# Altium PCB MotorSurucuv2.PcbDoc
Units mm, origin at the board's own origin, x right, y up, seen from the top; angles counter-clockwise.
Board outline 44.6 x 69.1 mm, 2 copper layers (Top Layer, Bottom Layer); 36 components, 21 nets, 93 pads, 42 vias.
Unrouted connection lines stored in the file: 18.
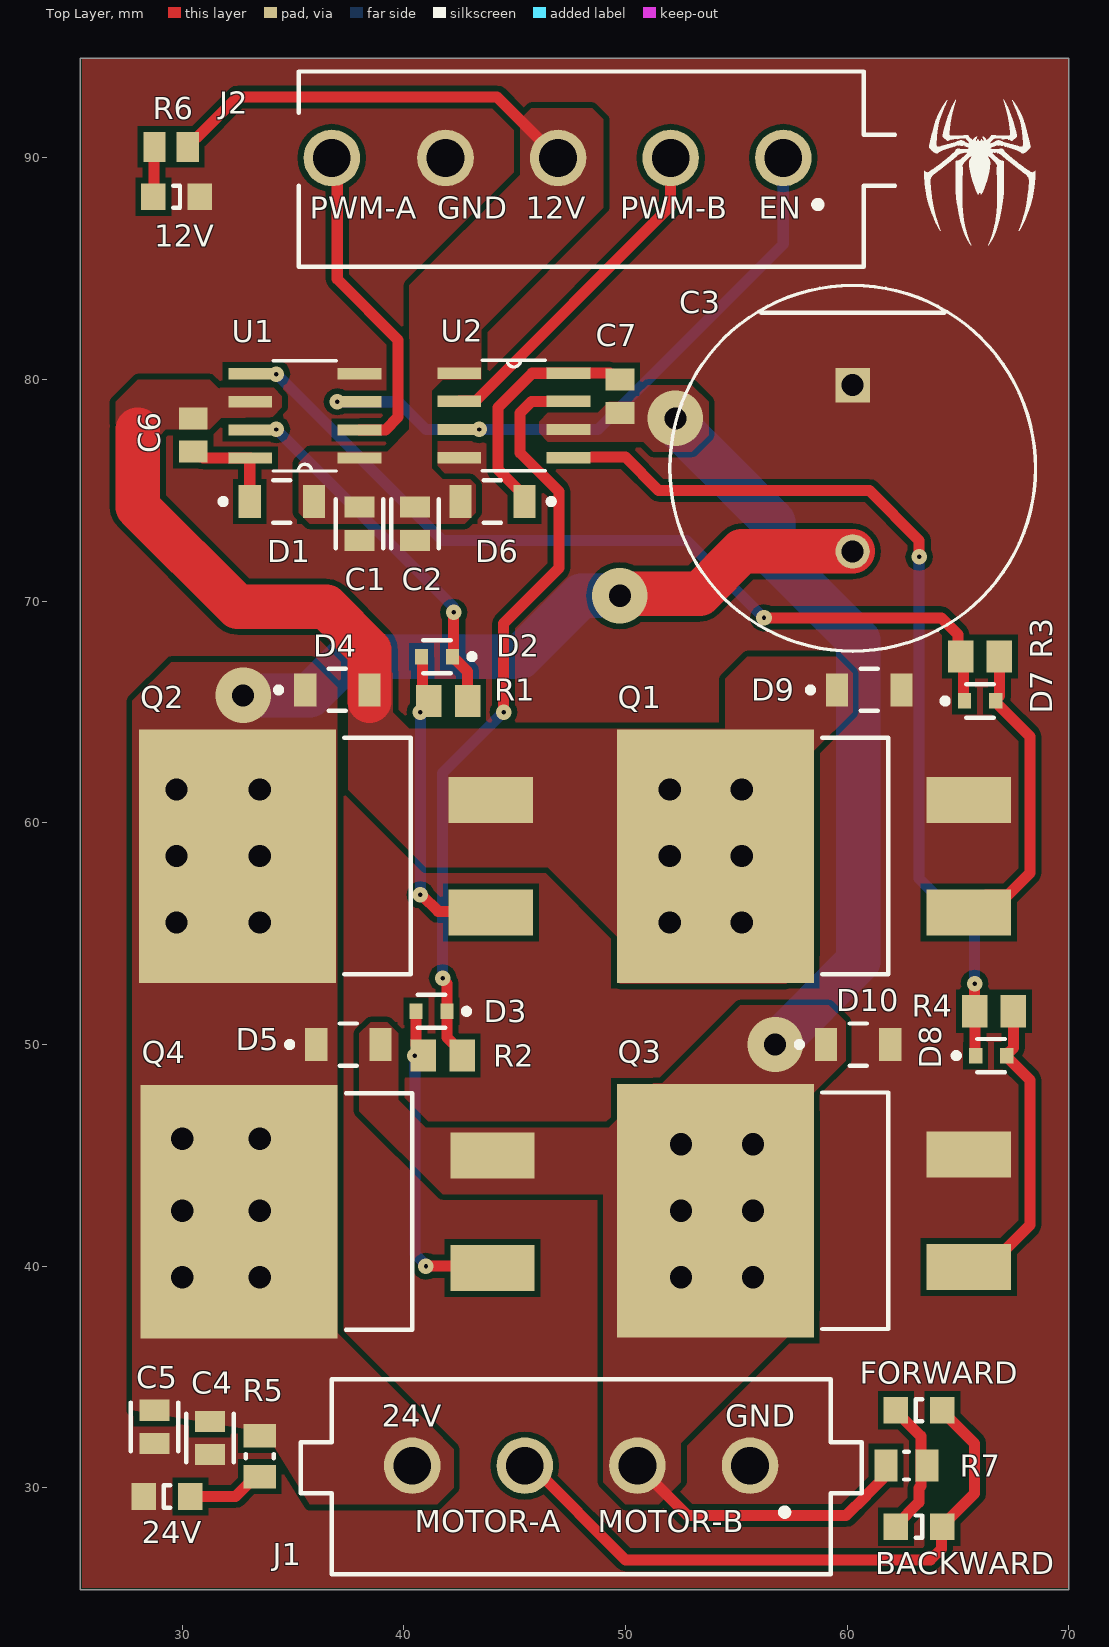
[diagram p0: Top Layer view]
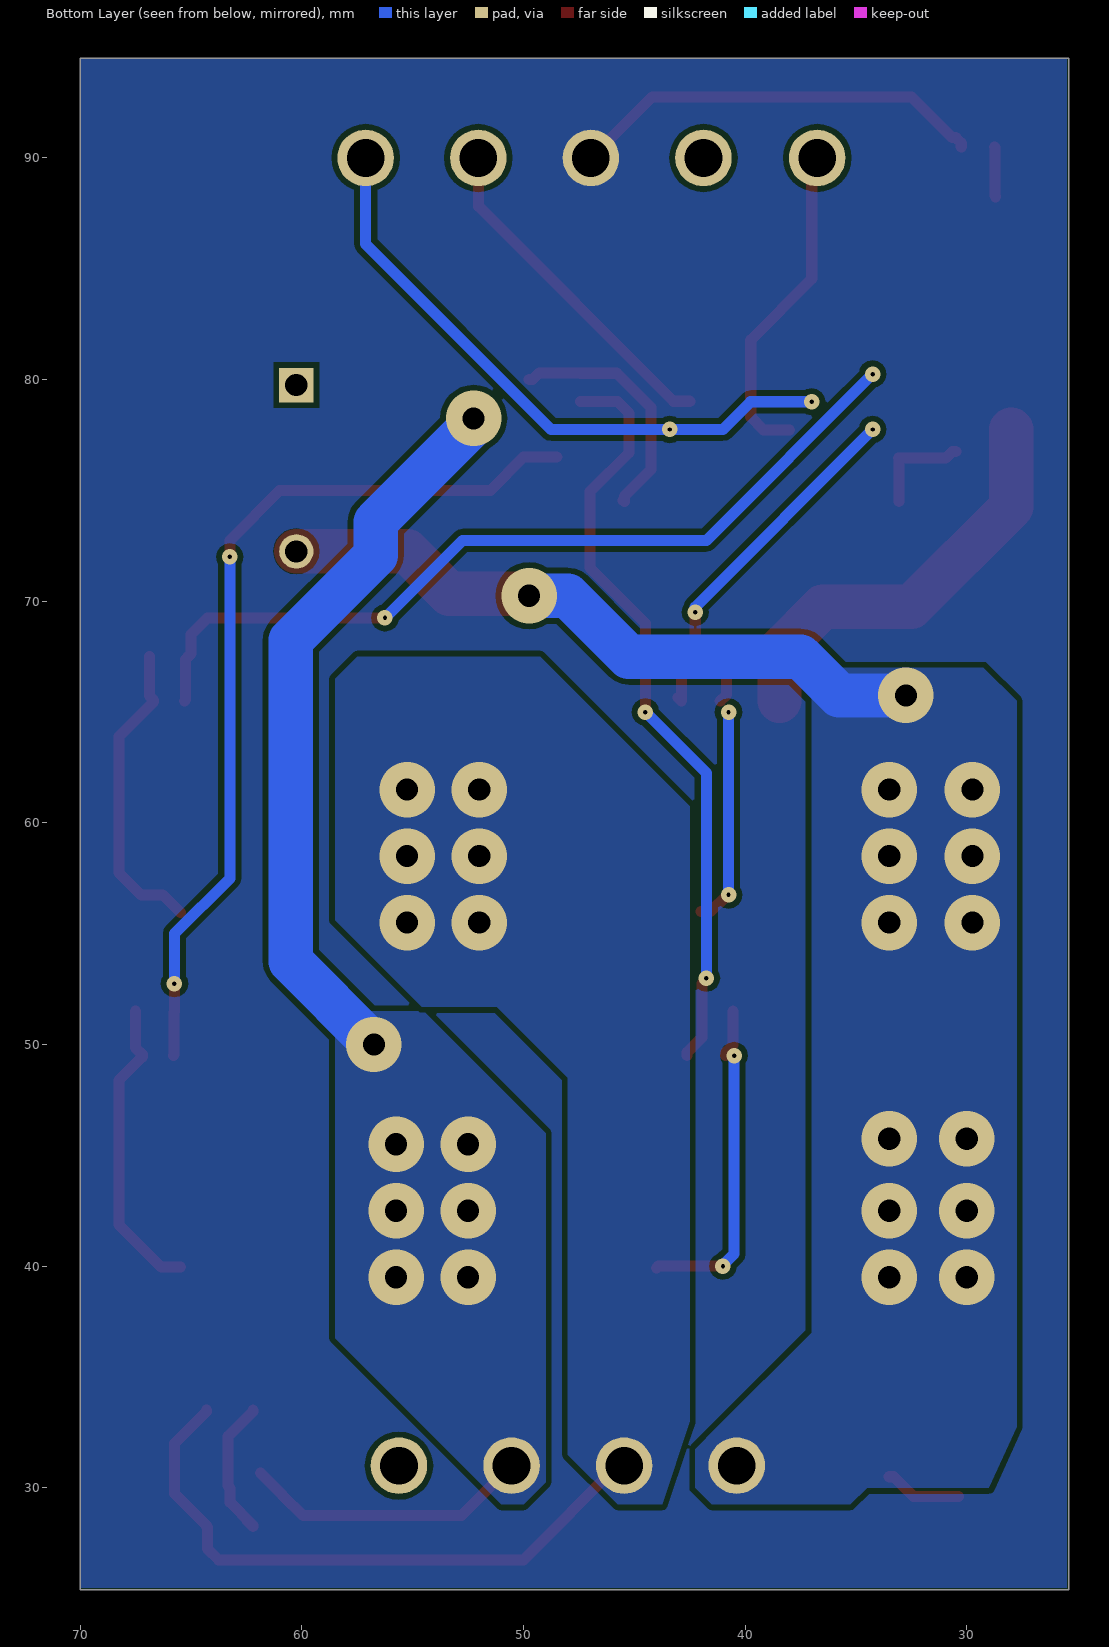
[diagram p1: Bottom Layer view, seen from below]
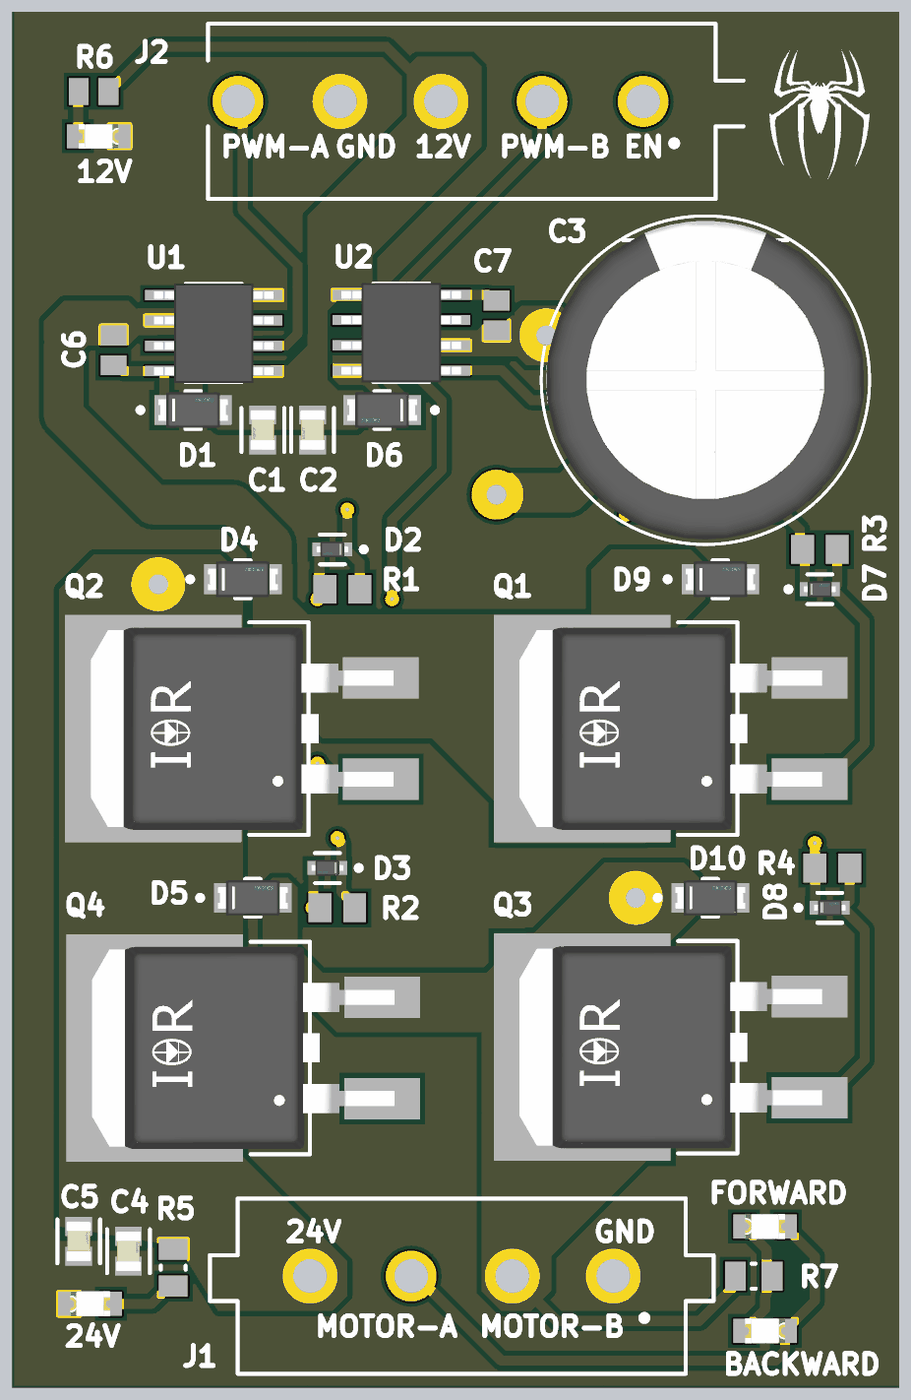
[diagram p2: 3D render of the assembled board from above, using the file's embedded part models]

## Layer stack, top to bottom
Top Solder: solder mask 0.0102, Solder Resist, Dk 3.5
Top Layer: signal copper 0.0356
Dielectric 1: dielectric 0.32, FR-4, Dk 4.8
Bottom Layer: signal copper 0.0356
Bottom Solder: solder mask 0.0102, Solder Resist, Dk 3.5

## Board outline
25.4,25.4 70,25.4 70,94.5 25.4,94.5

## Design rules (kind name [scope] priority, off if disabled: settings)
Clearance [All] p1: gap=0.254 ignorepadtopadclearanceinfootprint=FALSE except(0: Arc-Hole Track-Hole SMDPad-Hole THPad-Hole Via-Hole Fill-Hole Poly-Hole Region-Hole Text-Hole)
HoleSize [All] p1: absolutevalues=TRUE maxlimit=6.54 minlimit=0.2 maxpercent=80.000 minpercent=20.000
MinimumSolderMaskSliver [All] p1: minsoldermaskwidth=0.15
PolygonConnect [All] p1: connectstyle=Relief reliefconductorwidth=0.254 reliefentries=4 polygonreliefangle="90 Angle" airgapwidth=0.254
RoutingVias [All] p1: holewidth=0.711 width=1.27 viastyle="Through Hole" minholewidth=0.711 minwidth=1.27 maxholewidth=0.711 maxwidth=1.27
SilkToSolderMaskClearance [IsPad] p1: minsilkscreentomaskgap=0.1 clearancetoexposedcopper=TRUE
SolderMaskExpansion [All] p1: expansion=0.102 istentingtop=FALSE
Width [All] p1: maxlimit=6 minlimit=0.254 preferedwidth=0.254
27 further rules are at their usual default settings.

## Components (designator, comment, footprint, x,y, rotation, side; value= is the part's Value field where it differs from the comment)
12V "150080RS75000" 0805_A 29.75,88.25 r180 top (schematic designator LED2)
24V "150080RS75000" 0805_A 29.321,29.609 r0 top (schematic designator LED1)
BACKWARD "150080BS75000" 0805_A 63.25,28.25 r180 top (schematic designator LED4)
C1 "C0805C104K5RACTU" FP-C0805C-DN-MFG 38,73.5 r90 top value="0.10 μF"
C2 "C0805C104K5RACTU" FP-C0805C-DN-MFG 40.5,73.5 r90 top value="0.10 μF"
C3 "EEUFR1H102B" FP-RAD-TH-D_16_0_5-L_25_2-MFG 60.25,76 r270 top
C4 "470nF" FP-C0805C-DN-MFG 31.25,32.25 r270 top value="0.47 μF"
C5 "470nF" FP-C0805C-DN-MFG 28.75,32.75 r270 top value="0.47 μF"
C6 "1uF" CAPC2013X135X45LL10T25 30.5,77.5 r270 top
C7 "1uF" CAPC2013X135X45LL10T25 49.75,79.25 r90 top
D1 "1N5819HW1-7-F" FP-SOD123F_Type_B-MFG 34.5,74.5 r0 top value=30pF
D2 "1N4148WT-7" FP-SOD523-MFG 41.5,67.5 r180 top
D3 "1N4148WT-7" FP-SOD523-MFG 41.25,51.5 r180 top
D4 "1N5819HW1-7-F" FP-SOD123F_Type_B-MFG 37,66 r0 top value=30pF
D5 "1N5819HW1-7-F" FP-SOD123F_Type_B-MFG 37.5,50 r0 top value=30pF
D6 "1N5819HW1-7-F" FP-SOD123F_Type_B-MFG 44,74.5 r180 top value=30pF
D7 "1N4148WT-7" FP-SOD523-MFG 66,65.5 r0 top
D8 "1N4148WT-7" FP-SOD523-MFG 66.5,49.5 r0 top
D9 "1N5819HW1-7-F" FP-SOD123F_Type_B-MFG 61,66 r0 top value=30pF
D10 "1N5819HW1-7-F" FP-SOD123F_Type_B-MFG 60.5,50 r0 top value=30pF
FORWARD "150080BS75000" 0805_A 63.25,33.5 r0 top (schematic designator LED3)
J1 "yesil klemens disi" "yesil klemens disi" 48,31 r180 top
J2 "5li klemens disi" "5li klemens disi" 49.5,90 r180 top
Q1 "IRF3205ZSTRLPBF" FP-PG-TO263-3-MFG 58.5,58.5 r90 top
Q2 "IRF3205ZSTRLPBF" FP-PG-TO263-3-MFG 36.945,58.5 r90 top
Q3 "IRF3205ZSTRLPBF" FP-PG-TO263-3-MFG 58.5,42.5 r90 top
Q4 "IRF3205ZSTRLPBF" FP-PG-TO263-3-MFG 37.015,42.46 r90 top
R1 "47" RESC2013X70X40NL20T20 42,65.5 r180 top
R2 "47" RESC2013X70X40NL20T20 41.75,49.5 r0 top
R3 "47" RESC2013X70X40NL20T20 66,67.5 r0 top
R4 "47" RESC2013X70X40NL20T20 66.625,51.5 r180 top
R5 "1K" RESC2013X50X30NL20T20 33.5,31.425 r270 top
R6 "510" RESC2013X60X40LL20T25 29.5,90.5 r180 top
R7 "1K" RESC2013X50X30NL20T20 62.675,31 r0 top
U1 "IR2104SPBF" IR2104 39.473,78.492 r180 top
U2 "IR2104SPBF" IR2104 41.027,78.258 r0 top

## Footprints (in the part's own frame and the unit in brackets; to place one, negate y for a bottom-side part, rotate by r counter-clockwise, add the part's x,y. Pads: shape width x height; smd on the part's side, far side on the other; paste and mask are expansions set on the pad)
"5li klemens disi" [mm]
  round 2.55 hole 1.7: 1(-7.62,0) 2(-2.54,0) 3(2.54,0) 4(7.62,0) 5(12.75,0)
  silkscreen extent -12.66,-3.9 14.25,4.9
0805_A [mm] "Chip LED, 2-Leads, Body 2.0x1.3mm, IPC Medium Density"
  rect 1.1x1.2 smd: 1(-1.05,0) 2(1.05,0)
  silkscreen extent -0.15,-0.5 0.15,0.5, body extent -1,-0.62 1,0.63, height 0.68
CAPC2013X135X45LL10T25 [mm] "Chip Capacitor, 2-Leads, Body 2.00x1.25mm, IPC High Density"
  rect 1x1.3 smd: 1(-0.75,0) 2(0.75,0)
  body extent -1.05,-0.67 1.05,0.68, height 1.35
FP-C0805C-DN-MFG [mm]
  rect 0.95x1.35 smd paste+0 mask+0: 1(-0.75,0) 2(0.75,0)
  silkscreen extent -1.1,-1.07 1.1,1.07, body extent -1.4,-0.85 1.4,0.85, height 0.25
FP-PG-TO263-3-MFG [mm]
  rect 2.08x3.81 smd paste+0 mask+0: 1(-2.54,-6.985) 3(2.54,-6.985)
  rect 11.43x8.89 smd paste+0 mask+0: 4(0,4.445)
  silkscreen extent -5.34,-3.36 5.34,-0.38, body extent -5.81,-8.99 5.81,8.99, height 0.25
FP-RAD-TH-D_16_0_5-L_25_2-MFG [mm]
  rect 1.55x1.55 hole 1 paste-2539.97 mask+0: 1(-3.75,0)
  round 1.55 hole 1 paste-2539.97 mask+0: 2(3.75,0)
  silkscreen extent -8.25,-8.25 8.25,8.25, body extent -8.35,-8.35 8.35,8.35, height 0.25
FP-SOD123F_Type_B-MFG [mm]
  rect 1x1.5 smd paste+0 mask+0: 1(-1.45,0) 2(1.45,0)
  silkscreen extent -2.77,-0.95 0.38,0.95, body extent -2.05,-1.05 2.05,1.05, height 0.25
FP-SOD523-MFG [mm]
  rect 0.6x0.7 smd paste+0 mask+0: 1(-0.7,0) 2(0.7,0)
  silkscreen extent -1.7,-0.75 0.63,0.75, body extent -1.1,-0.53 1.1,0.53, height 0.25
IR2104 [mil]
  rect 78x20 smd: 1(58,80) 2(58,30) 3(58,-20) 4(58,-70) 5(252,-70) 6(252,-20) 7(252,30) 8(252,80)
  silkscreen extent 99,-93 211,103, body extent 37,-93 273,103, height 69
RESC2013X50X30NL20T20 [mm] "Chip Resistor, 2-Leads, Body 2.00x1.25mm, IPC Medium Density"
  rect 1.05x1.45 smd: 1(-0.925,0) 2(0.925,0)
  silkscreen extent -0.1,-0.63 0.1,0.63, body extent -1.1,-0.72 1.1,0.72, height 0.5
RESC2013X60X40LL20T25 [mm] "Chip Resistor, 2-Leads, Body 2.00x1.25mm, IPC High Density"
  rect 1x1.35 smd: 1(-0.75,0) 2(0.75,0)
  body extent -1.1,-0.72 1.1,0.72, height 0.6
RESC2013X70X40NL20T20 [mm] "Chip Resistor, 2-Leads, Body 2.00x1.25mm, IPC Medium Density"
  rect 1.15x1.45 smd: 1(-0.875,0) 2(0.875,0)
  body extent -1.1,-0.72 1.1,0.72, height 0.7
"yesil klemens disi" [mm]
  round 2.55 hole 1.7: 1(-7.62,0) 2(-2.54,0) 3(2.54,0) 4(7.62,0)
  silkscreen extent -12.66,-3.9 12.66,4.9, body extent -11.29,-3.9 11.03,4.7, height 11.61

## Part data
12V 24V: library part CMP-1426-00011-1, "SMD mono-color Chip LED, WL-SMCW, Red", Color=Red, Manufacturer="Wuerth Elektronik", ComponentLink1Description="Manufacturer URL", ComponentLink1URL=http://www.we-online.com, ComponentLink2Description=Datasheet, ComponentLink2URL=http://katalog.we-online.com/led/datasheet/150080RS75000.pdf, PackageReference=0805_A, PartNumber=150080RS75000
BACKWARD FORWARD: library part CMP-1426-00008-1, "SMD mono-color Chip LED, WL-SMCW, Blue", Color=Blue, Manufacturer="Wuerth Elektronik", ComponentLink1Description="Manufacturer URL", ComponentLink1URL=http://www.we-online.com, ComponentLink2Description=Datasheet, ComponentLink2URL=http://katalog.we-online.com/led/datasheet/150080BS75000.pdf, PackageReference=0805_A, PartNumber=150080BS75000
C1 C2: library part CMP-2007-00279-2, "CAP CER 0.1UF 50V X7R 0805", Capacitance="0.10 μF", Manufacturer=KEMET, Package=C0805C-DN, Temperature="-55°C to +125°C", Temperature Characteristic=X7R, Temperature Coefficient=30ppm/°C, Temperature Range High=+125°C, Temperature Range Low=-55°C, Tolerance=0.1, Voltage Rating="50 V", Automotive=No, Category=Cap, ComponentLink2Description=Datasheet, ComponentLink2URL=https://content.kemet.com/datasheets/KEM_C1003_C0G_SMD.pdf, Device Class L1="Passive Components", Device Class L2=Capacitors, Device Class L3="Ceramic Capacitors", Digikey Description="CAP CER 0.1UF 50V X7R 0805", Height=0.88mm, Ipc Land Pattern Name=CAPC200125X78, Lead Free=Yes, Manufacturer Part Number=C0805C104K5RACTU, Material=Ceramic, Mouser Description="Cap Ceramic 0.1uF 50V X7R 10% SMD 2.0 x 1.2 mm 125 C Paper T/R", Octopart=https://octopart.com/c0805c104k5ractu-kemet-143926, RoHS=TRUE
C3: library part CMP-05427-000487-1, "Aluminum Electrolytic Capacitors (Radial Lead Type) 1000uF ±20% 50V", Capacitance=1mF, Case/Package=Radial, ESR (Equivalent Series Resistance)=16mR, Max Operating Temperature=105°C, Min Operating Temperature=-40°C, Package Quantity=250, Ripple Current=3.32A, Tolerance=20%, Voltage Rating=50V, Contact Plating=Tin, Diameter=16mm, Features="General Purpose", Height=25mm, Height - Seated (Max)=0.984inch, Impedance=16mR, Lead Diameter=0.8mm, Lead Free="Lead Free", Lead Pitch=7.5mm, Length=25mm, Life (Hours)=10000Hour, Mount="Through Hole", Number of Pins=2, Packaging="Tape and Reel", Polarity=Polar, Radiation Hardening=No, REACH SVHC="No SVHC", RoHS Compliant=Yes, Series=FR, Termination="Through Hole", Voltage Rating (DC)=50V
C4 C5: library part CMP-2007-03659-2, "CAP CER 0.47UF 50V 10% X7R 0805 C0805C474K5RACTU", Capacitance="0.47 μF", Manufacturer=KEMET, Manufacturer Part Number=C0805C474K5RACTU, Package=C0805C-DN, Temperature="-55°C to +125°C", Temperature Characteristic=X7R, Temperature Coefficient=30ppm/°C, Temperature Range High=+125°C, Temperature Range Low=-55°C, Tolerance=0.1, Voltage Rating="50 V", Automotive=No, Category=Cap, ComponentLink2Description=Datasheet, ComponentLink2URL=https://content.kemet.com/datasheets/KEM_C1003_C0G_SMD.pdf, Device Class L1="Passive Components", Device Class L2=Capacitors, Device Class L3="Ceramic Capacitors", Digikey Description="CAP CER 0.47UF 50V 10% X7R 0805", Height=0.88mm, Ipc Land Pattern Name=CAPC200125X78, Lead Free=Yes, Material=Ceramic, Mouser Description="0805 C 470nF Ceramic Multilayer Capacitor, 50 VDC, +125degC, X7R Dielec, +/-10%", Octopart=https://octopart.com/c0805c474k5ractu-kemet-144543, RoHS=TRUE
C6: library part CMP-1036-04761-2, "GRM21BR71H105KA12L", Manufacturer=Murata, Part Number=GRM21BR71H105KA12L
C7: library part CMP-1036-04761-2, "GRM21BR71H105KA12L    0805", Manufacturer=Murata, Part Number=GRM21BR71H105KA12L
D1 D4 D5 D6 D9 D10: library part CMP-12791-000028-1, "DIODE SBR 40V 1A SOD123F", Capacitance=30pF, Forward Current=1A, Manufacturer="Diodes Inc.", Max Junction Temp=+125°C, Max Repetitive Reverse Voltage=40V, Max Surge Forward Current=30A, Package="SOD123F (Type B)", Peak Reverse Current=0.5mA, Temperature="-55°C to +125°C", Temperature Range Low=-55°C, Automotive=No, Category=Diode, ComponentLink2Description=Datasheet, ComponentLink2URL=https://www.diodes.com/assets/Datasheets/1N5819HW1.pdf, Device Class L1="Discrete Semiconductors", Device Class L2=Diodes, Device Class L3="Rectifier Diodes", Digikey Description="DIODE SBR 40V 1A SOD123F", Footprint Url=https://www.diodes.com/assets/Package-Files/SOD123F%20(Type%20B).pdf, Height=1.15mm, Ipc Land Pattern Name=SOD350180X98-2, Lead Free=Yes, Manufacturer Part Number=1N5819HW1-7-F, Mouser Description="Schottky Diodes & Rectifiers 1A SBR 40Vrrm 0.51Vf 0.5mA 28Vrms", Octopart=https://octopart.com/1n5819hw1-7-f-diodes+inc.-67250096, Reverse Voltage=40V, RoHS=TRUE, Temperature Range High=+125°C
D2 D3 D7 D8: library part CMP-2000-05518-3, "DIODE GEN PURP 80V 125MA SOD523", Average Rectified Current=125mA, Capacitance=2pF, Forward Current=250mA, Forward Voltage=1.25V, Max Forward Surge Current (Ifsm)=2A, Max Operating Temperature=150°C, Max Repetitive Reverse Voltage (Vrrm)=100V, Max Reverse Voltage (DC)=80V, Min Operating Temperature=-65°C, Package Quantity=3000, Peak Reverse Current=1uA, Power Dissipation=150mW, Contact Plating=Tin, Current Rating=125mA, Element Configuration=Single, Height=0.65mm, Lead Free="Lead Free", Length=0.9mm, Max Surge Current=2A, Mount="Surface Mount", Number of Pins=2, Output Current=125mA, Packaging="Tape and Reel", Peak Non-Repetitive Surge Current=2A, Polarity=Standard, Power Rating=150mW, Radiation Hardening=No, REACH SVHC="No SVHC", Recovery Time=4ns, Reverse Recovery Time=4ns, Voltage Rating (DC)=80V, Weight=3.5E-05oz, Width=1.3mm
J1: "WR-TBL SERIES 3055_5.08 MM_PCB H", Package=None, Check_prices=https://www.snapeda.com/parts/691305530004/Wurth+Electronics+Inc./view-part/?ref=eda, MF="WÃ¼rth Elektronik", MP=691305530004, SnapEDA_Link=https://www.snapeda.com/parts/691305530004/Wurth+Electronics+Inc./view-part/?ref=snap
Q1 Q2 Q3 Q4: library part CMP-32901-000456-1, "MOSFET N-CH 55V 75A D2PAK", Case/Package=D2PAK, Continuous Drain Current (ID)=75A, Drain to Source Resistance=6.5mR, Drain to Source Voltage (Vdss)=55V, Gate to Source Voltage (Vgs)=20V, Input Capacitance=3.45nF, Max Operating Temperature=175°C, Max Power Dissipation=170W, Min Operating Temperature=-55°C, Element Configuration=Single, Halogen Free="Halogen Free", Height=0.19inch, Lead Free="Contains Lead", Length=0.42inch, Max Dual Supply Voltage=55V, Mount="Surface Mount", Number of Pins=3, Packaging="Tape and Reel", Power Dissipation=170W, Rds On Max=6.5mR, RoHS Compliant=Yes, Turn-Off Delay Time=45ns, Turn-On Delay Time=18ns, Width=0.38inch
R1 R2 R3 R4: library part CMP-2001-00205-1, "ERJ6ENF47R0V", Manufacturer=Panasonic, Part Number=ERJ6ENF47R0V
R5 R7: library part CMP-1013-00510-2, "CRCW08051K00FKEA", Manufacturer="Vishay Dale", Part Number=CRCW08051K00FKEA
R6: library part CMP-2001-00648-1, Manufacturer=Panasonic, Part Number=ERA6AEB511V
U1 U2: library part IR2104

## Via types
v1: diameter 2.5, hole 1, Top Layer to Bottom Layer, 28 vias
v2: diameter 0.7, hole 0.2, Top Layer to Bottom Layer, 14 vias

## Nets (pads, with @x,y where several pads share a name; then routed paths per layer and width w, separated by ;. In a path a pad name is that pad's centre, name@x,y a point inside that pad or via, vN(x,y) a via of type N, cw(c..) or ccw(c..) an arc to the next point about the centre after c; other vN are vias at no path point)
+12: C1.2 C2.2 D1.2 D6.2 J2.3 R6.1 U1.1 U2.1 | length 18.9
  Top Layer w0.5: R6.1 30.25,90.675 30.5,90.925 30.675,90.925 32.5,92.75 44.21,92.75 J2.3
+24: C3.2 C4.1 C5.1 D4.1 D5.1 J1.4 Q2.4 Q4.4 R5.1 | length 30.2
  Top Layer w2: v1(49.75,70.25) 49.846,70.346 53.346,70.346 55.25,72.25 C3.2
  Bottom Layer w2: v1(32.75,65.75) 35.75,65.75 37.5,67.5 45.25,67.5 48,70.25 v1(49.75,70.25)
  other v1: 30,39.5 33.5,39.5 30,42.5 33.5,42.5 30,45.75 33.5,45.75 29.75,55.5 33.5,55.5 29.75,58.5 33.5,58.5 29.75,61.5 33.5,61.5
EN: J2.1 U1.3 U2.3 | length 28
  Bottom Layer w0.5: v2(37,79) 39.75,79 41,77.75 43.5,77.75 48.75,77.75 57.12,86.12 J2.1
  other v2: 43.396,77.75
GND: 12V.1 24V.1 C1.1 C2.1 C3.1 C4.2 C5.2 D9.2 D10.2 J1.1 J2.4 Q1.3 Q3.3 U1.4 U2.4
MotorA: BACKWARD.1 C6.1 D4.2 D9.1 FORWARD.2 J1.3 Q1.4 Q2.3 U1.6 | length 47.2
  Top Layer w0.5: J1.3 45.75,31 50,26.75 63.75,26.75 64.25,27.25 64.25,28.2 BACKWARD.1 64.3,28.3 65.75,29.75 65.75,32 64.3,33.45 FORWARD.2
  Top Layer w2: 28,77.75 28,74.25 32.5,69.75 36.5,69.75 38.45,67.8 D4.2@38.45,65.5
  other v1: 52,55.5 55.25,55.5 52,58.5 55.25,58.5 52,61.5 55.25,61.5
MotorB: C7.1 D5.2 D10.1 J1.2 Q3.4 Q4.3 R7.1 U2.6 | length 46.3
  Top Layer w0.5: J1.2 52.79,28.75 59.957,28.75 60.866,29.659 60.866,29.666 R7.1@61.875,30.675
  Bottom Layer w2: v1(52.25,78.25) 52.25,78 56.673,73.577 56.673,72.077 60.5,68.25 60.5,53.75 v1(56.75,50)
  other v1: 52.5,39.5 55.75,39.5 52.5,42.5 55.75,42.5 52.5,45.5 55.75,45.5
NetC6_2: C6.2 D1.1 U1.8 | length 4.7
  Top Layer w0.5: C6.2 30.65,76.75 30.94,76.46 U1.8@33.054,76.46 ; D1.1 33.05,76.456 U1.8@33.054,76.46 ; U1.8 U1.8@33.054,76.46
NetC7_2: C7.2 D6.1 U2.8 | length 11.1
  Top Layer w0.5: D6.1@45.5,74.55 D6.1 45.45,74.75 44.25,75.95 44.25,78.75 45.786,80.286 47.424,80.286 U2.8 49.31,80.29 49.6,80 C7.2
NetD2_1: D2.1 R1.1 U1.7 | length 16.1
  Top Layer w0.5: D2.1 42.2,67.45 42.25,67.4 42.3,67.4 42.875,66.825 R1.1 R1.1@43.029,65.654 ; D2.1@42.25,67.5 v2(42.25,69.5)
  Bottom Layer w0.5: v2(34.25,77.75) 42.25,69.75 v2(42.25,69.5)
NetD2_2: D2.2 Q2.1 R1.2 | length 11.9
  Top Layer w0.5: v2(40.75,56.75) 40.804,56.75 41.554,56 42,56 ; D2.2 40.85,67.45 40.85,65.775 R1.2
  Bottom Layer w0.5: v2(40.75,56.75) v2(40.75,65)
NetD3_1: D3.1 R2.2 U2.7 | length 34.7
  Top Layer w0.5: v2(41.75,53) 41.75,52.946 41.95,52.746 41.95,50.325 42.625,49.65 R2.2 ; v2(44.5,65) 44.5,69 47,71.5 47,74.95 45.25,76.7 45.25,78.5 45.766,79.016 47.424,79.016 U2.7
  Bottom Layer w0.5: v2(41.75,53) 41.75,62.25 v2(44.5,65)
NetD3_2: D3.2 Q4.1 R2.1 | length 14.9
  Top Layer w0.5: D3.2 40.55,49.975 40.875,49.65 R2.1 ; v2(41,40) 43.92,40 Q4.1
  Bottom Layer w0.5: v2(40.5,49.5) 40.5,40.554 41,40.054 v2(41,40)
NetD7_1: D7.1 R3.1 U1.5 | length 38.7
  Top Layer w0.5: v2(56.25,69.25) 64.25,69.25 65,68.5 65,67.625 R3.1 65.25,67.375 65.25,65.55 D7.1
  Bottom Layer w0.5: v2(34.25,80.25) 41.75,72.75 52.75,72.75 v2(56.25,69.25)
NetD7_2: D7.2 Q1.1 R3.2 | length 14
  Top Layer w0.5: Q1.1 66.275,56.75 67.25,56.75 68.25,57.75 68.25,63.9 66.7,65.45 D7.2 66.7,65.55 66.875,65.725 R3.2
NetD8_1: D8.1 R4.2 U2.5 | length 40.1
  Top Layer w0.5: 48.5,76.5 50,76.5 51.5,75 61,75 63.25,72.75 v2@63.25,72.25 ; v2(65.75,52.75) R4.2 65.775,51.475 65.775,49.525 D8.1
  Bottom Layer w0.5: v2(63.25,72) 63.25,57.5 65.75,55 v2@65.75,53
NetD8_2: D8.2 Q3.1 R4.1 | length 13.8
  Top Layer w0.5: Q3.1 66.35,39.96 68.25,41.86 68.25,48.4 67.2,49.45 D8.2 67.2,49.55 67.5,49.85 R4.1
NetLED1_2: 24V.2 R5.2 | length 3.5
  Top Layer w0.5: 24V.2 32.409,29.609 33.3,30.5 R5.2
NetLED2_2: 12V.2 R6.2 | length 2.3
  Top Layer w0.5: 12V.2 28.725,88.275 28.725,90.475 R6.2
NetLED3_1: BACKWARD.2 FORWARD.1 R7.2 | length 6.6
  Top Layer w0.5: FORWARD.1 62.2,33.45 63.325,32.325 63.325,30.075 63.25,30 63.25,29.35 62.2,28.3 BACKWARD.2 BACKWARD.2@62.5,28.55
PWMA: J2.5 U1.2 | length 14.9
  Top Layer w0.5: J2.5 36.996,89.754 36.996,84.539 39.746,81.789 39.746,78.316 39.164,77.734 38.004,77.734 U1.2
PWMB: J2.2 U2.2 | length 15.4
  Top Layer w0.5: U2.2 42.504,79.024 43.241,79.024 52.04,87.823 J2.2

## Polygon pours and split planes (outlines as drawn)
GND on Top Layer "GND_L01_P033" (solid, pour order 33): 25.5,25.5 70,25.5 70,94.5 25.5,94.5
+24 on Top Layer "+24_L01_P024" (solid, pour order 24): 27.75,33.5 33.75,32.5 35.75,29.25 41.5,29.25 42.25,30 42.25,31.75 41.25,32.75 37,37 37,66.116 35.866,67.25 29.5,67.25 27.75,65.5
+12 on Top Layer "+12_L01_P011" (solid, pour order 11): 41.75,75.5 43,75.5 43.25,75.25 43.25,74 42.75,73.5 35.75,73.5 35.25,74 35.25,76.25 35.75,76.75 39.25,76.75 40.25,77.75 40.25,84.25 45.25,89.25 45.25,91.75 45.75,92.25 48.5,92.25 49,91.75 49,87.75 43.5,82.25 43.5,80 41.75,80 41.25,79.5 41.25,76
MotorA on Top Layer "MOTORA_L01_P013" (solid, pour order 13): 59.5,67.5 60.25,66.75 60.25,65 58.5,63.25 54.5,63.25 54.5,66.5 55.5,67.5
MotorB on Top Layer "MOTORB_L01_P028" (solid, pour order 28): 51.262,77.2 46.5,77.2 46.1,77.6 46.1,78.1 46.5,78.5 49.15,78.5
MotorB on Top Layer "MOTORB_L01_P014" (solid, pour order 14): 46.5,77.5 50.5,77.5 51.25,76.75 53,76.75 53.75,77.5 53.75,79 53,79.75 51,79.75 50.25,79 49.25,79 48.25,78 46.5,78
MotorA on Top Layer "MOTORA_L01_P027" (solid, pour order 27): 31.75,78.25 34.05,78.3 34.5,78.75 34.5,79.25 34.125,79.625 31.625,79.625
MotorA on Top Layer "MOTORA_L01_P012" (solid, pour order 12): 34,78.75 32.25,78.75 31.25,77.75 29.25,77.75 29,77.5 27.5,77.5 27,78 27,79 28,80 31.25,80 32,79.25 34,79.25
MotorB on Top Layer "MOTORB_L01_P015" (solid, pour order 15): 59.178,51.767 59.928,51.017 59.928,49.267 58.178,47.517 50.928,47.517 55.178,51.767
MotorA on Top Layer "MOTORA_L01_P008" (solid, pour order 8): 37.5,66.25 38.25,67 39.25,67 39.5,66.75 39.5,65 40.25,64.25 49.75,64.25 57.5,64.25 58.5,63.25 58.5,54 57.25,52.75 49.75,52.75 49.75,54.75 46.5,58 41,58 37.5,61.5
MotorB on Top Layer "MOTORB_L01_P007" (solid, pour order 7): 38.75,51 38.25,50.5 38.75,51 39.25,51 39.75,50.5 39.75,47.5 41,46.25 49.5,46.25 49.5,43.5 49.25,43.25 41.75,43.25 38,47 38,50.5 38.5,51
MotorB on Top Layer "MOTORB_L01_P006" (solid, pour order 6): 50,29.25 51.5,29.25 52.5,30.25 52.5,32 57.5,37 58.5,38 58.5,47 57.25,48.25 51.25,48.25 49,46 49,30.25
+12 on Bottom Layer "+12_L02_P032" (solid, pour order 32): 25.5,25.5 70,25.5 70,94.5 25.5,94.5
MotorA on Bottom Layer "MOTORA_L02_P004" (solid, pour order 4): 42.5,33 43.75,29.25 45.75,29.25 48,31.5 48,48.5 51.2,51.7 54.6,51.7 58.5,55.6 58.5,66.5 57.5,67.5 49.25,67.5 42.5,60.75
MotorB on Bottom Layer "MOTORB_L02_P005" (solid, pour order 5): 50,29.25 51,29.25 58.5,36.75 58.5,50.7 57.7,51.5 54.5,51.5 49,46 49,30.25
+24 on Bottom Layer "+24_L02_P016" (solid, pour order 16): 29,30 34.5,30 35.25,29.25 41.5,29.25 42.25,30 42.25,31.75 41.25,32.75 37,37 37,65.75 35.75,67 29.25,67 27.75,65.5 27.75,32.75

## Other copper
Top Layer:
  pour cut-out: 63.868,32.646 63.839,32.617 63.839,31.979 64.379,31.979 64.379,30.021 63.828,30.021 63.74,29.933 63.74,29.197 63.833,29.104 64.377,29.104 65.236,29.963 65.236,31.787 64.377,32.646

## Silkscreen, mask and mechanical layers (free items; w line width, h text height)
Top Overlay:
  drawing of 3 lines, arcs and shapes, not listed
  text "PWM-A" at 35.754,87.254 h1
  text "GND" at 41.504,87.254 h1
  text "12V" at 45.504,87.254 h1
  text "PWM-B" at 49.754,87.254 h1
  text "EN" at 56.004,87.254 h1
  text "24V" at 39.004,32.754 h1
  text "GND" at 54.504,32.754 h1
  text "MOTOR-A" at 40.504,28.004 h1
  text "MOTOR-B" at 48.754,28.004 h1